# EAGLE board Secondary Board PCB 2 v6 (EAGLE 9.7.0)
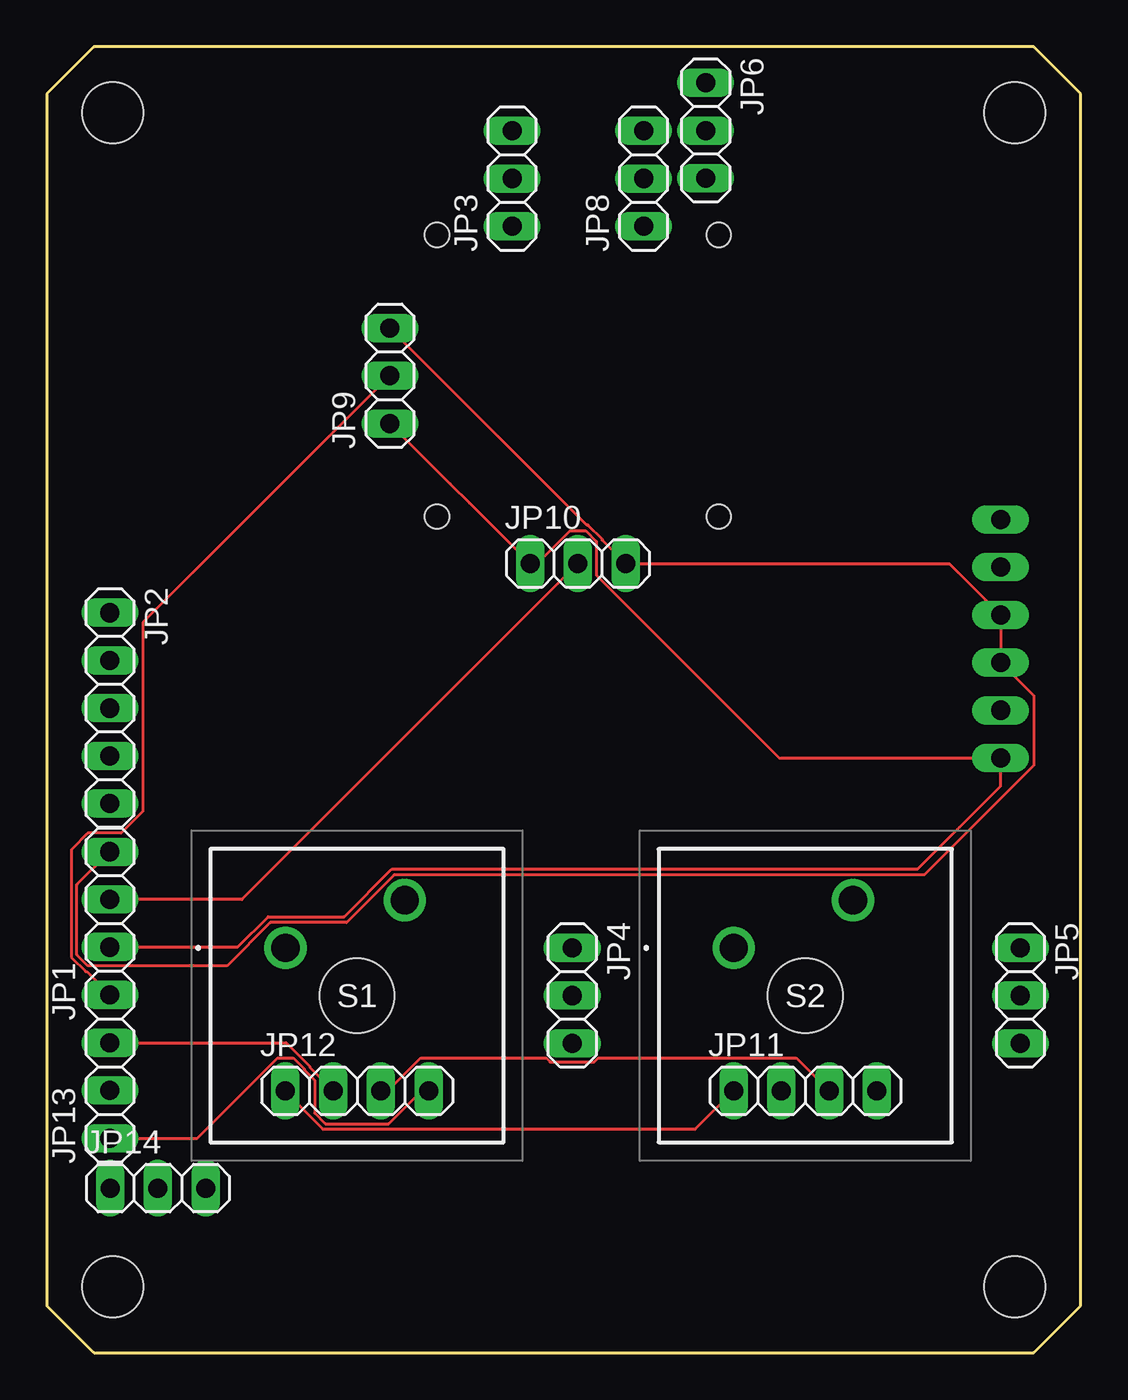
[diagram p0: board, top side]
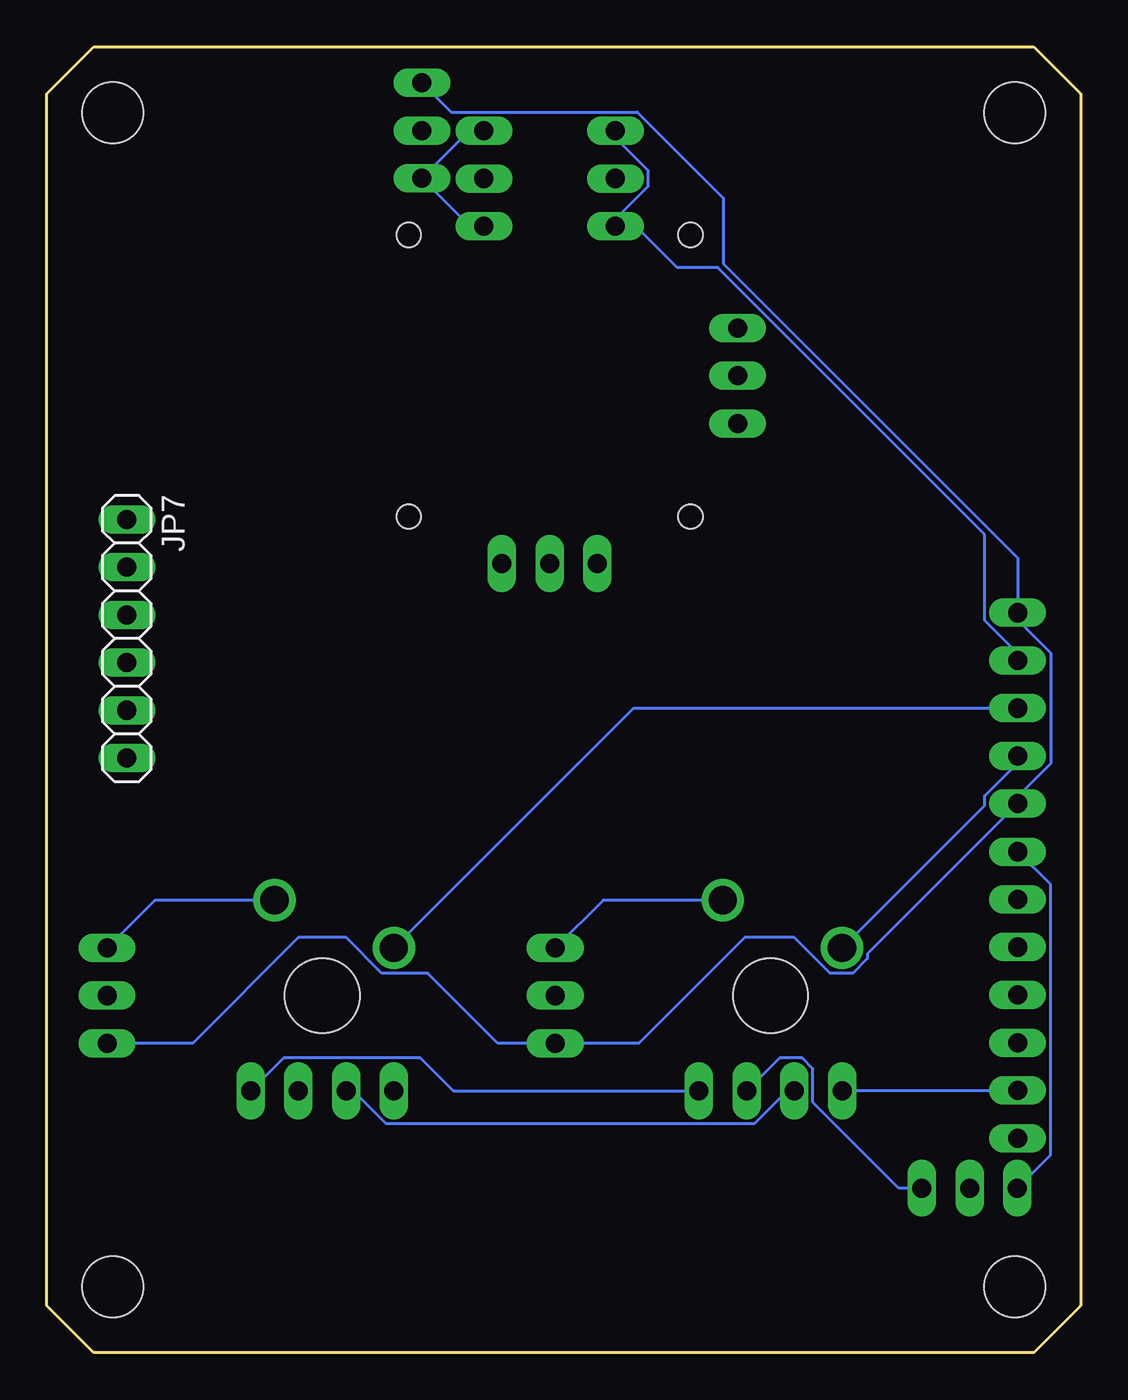
[diagram p1: board, bottom side, seen from below]

Size 55 x 69.5 mm. Coordinates in mm from the lower left corner, seen from the top.
Outline: 2.5,0 0,2.5 0,67 2.5,69.5 52.5,69.5 55,67 55,2.5 52.5,0 2.5,0
Copper layers (1*16): Top / Bottom
Stack-up Default Layer Stack: Top User Defined 0.035mm / Dielectric-1 User Defined 1.5mm / Bottom User Defined 0.035mm
Design rules "default": minimum track width 6mil, minimum drill 0.35mm, track to track 6mil, track to pad 6mil, pad to pad 6mil, via to via 6mil, smd to smd 6mil, copper to edge 40mil, drill to drill 6mil, minimum pad ring 10mil, minimum via ring 8mil, stop-mask expansion 4mil, vias tented up to drill 0mil, thermal gap 10mil
Holes 1.3 mm at 35.75,44.5 20.75,44.5 20.75,59.5 35.75,59.5
Holes 3.25 mm at 3.5,3.5 51.5,3.5 3.5,66 51.5,66

## Footprints (pad centres in the part's own frame; a part is rotated, then mirrored left to right if it is on the bottom)
1X04 = drill 1.016 long: 1 -3.81,0; 2 -1.27,0; 3 1.27,0; 4 3.81,0
1X05 = drill 1.016 long: 1 -5.08,0; 2 -2.54,0; 3 0,0; 4 2.54,0; 5 5.08,0
1X03 = drill 1.016 long: 1 -2.54,0; 2 0,0; 3 2.54,0
1X06 = drill 1.016 long: 1 -6.35,0; 2 -3.81,0; 3 -1.27,0; 4 1.27,0; 5 3.81,0; 6 6.35,0
MX1AE1NW = drill 1.499 pad 2.248: 1 0,0; 2 6.35,2.54 | hole 3.988: 3.81,-2.54

## Placement (x,y rotation side)
JP1  PINHD-1X4  [1X04]  3.35,22.85 90 top
JP2  PINHD-1X5  [1X05]  3.35,34.3 270 top
JP3  PINHD-1X3  [1X03]  24.75,62.5 90 top
JP4  PINHD-1X3  [1X03]  27.95,19 270 top
JP5  PINHD-1X3  [1X03]  51.8,19 270 top
JP6  PINHD-1X3  [1X03]  35.05,65.05 270 top
JP7  PINHD-1X6  [1X06]  50.75,38 270 bottom
JP8  PINHD-1X3  [1X03]  31.75,62.5 90 top
JP9  PINHD-1X3  [1X03]  18.25,52 90 top
JP10  PINHD-1X3  [1X03]  28.25,42 0 top
JP11  PINHD-1X4  [1X04]  40.35,13.93 0 top
JP12  PINHD-1X4  [1X04]  16.5,13.93 0 top
JP13  PINHD-1X3  [1X03]  3.35,13.95 90 top
JP14  PINHD-1X3  [1X03]  5.9,8.75 0 top
S1  MX1A-E1NW  [MX1AE1NW]  12.69,21.54 0 top
S2  MX1A-E1NW  [MX1AE1NW]  36.54,21.54 0 top

## Library data of the parts
JP1-JP14 = Connector; CATEGORY: CONNECTOR; SUB-CATEGORY: PIN-HEADER
S1 S2 = SamacSys_Parts; DESCRIPTION: Pushbutton Switches Full Travel, Mech. Keyswitch, Click Tactile Feel (Blue stem), 60cN, No LED, No Diode, Fixation Pins for PCB Mounting; HEIGHT: 15.2mm; MANUFACTURER_NAME: Cherry; MANUFACTURER_PART_NUMBER: MX1A-E1NW; MOUSER_PART_NUMBER: 540-MX1A-E1NW; MOUSER_PRICE-STOCK: https://www.mouser.co.uk/ProductDetail/CHERRY/MX1A-E1NW/?qs=Z7NFYKyvgJd45Wm4xzFv7w%3D%3D

## Nets
N$1: JP1.4 JP7.3 JP7.4 JP9.3 JP10.3 JP14.1
N$2: JP1.2 JP7.6 JP9.1 JP10.1
N$3: JP4.1 S1.2
N$4: JP5.1 S2.2
N$5: JP1.1 JP9.2
N$6: JP6.3 JP8.1 JP8.3
N$7: JP2.1 JP2.5 JP4.3 JP5.3 JP6.1
N$8: JP2.3 S2.1
N$9: JP2.4 S1.1
N$10: JP1.3 JP10.2
N$11: JP2.2 JP3.1 JP3.3
N$12: JP11.3 JP12.3 JP14.3
N$13: JP11.2 JP12.2 JP13.3
N$14: JP11.1 JP12.1 JP13.2
N$15: JP11.4 JP12.4 JP13.1

## Tracks (layer width: path | path; a pad name or v marks a point on that pad's centre or on a via)
N$1
  Top 0.152: JP1.4 1.6,24.91 1.6,21.17 2.18,20.59 9.59,20.59 11.89,22.89 15.94,22.89 18.48,25.43 46.7,25.43 52.5,31.24 52.5,34.98 JP7.4 JP7.3 48.02,42 JP10.3 29.55,43.24 29.55,43.3 28.79,44.06 28.73,44.06 JP9.3
  Bottom 0.152: JP14.1 1.6,10.51 1.6,24.91 JP1.4
N$2
  Top 0.152: JP9.1 21.47,46.24 22.49,45.22 JP10.1 26.09,42 27.84,43.75 28.66,43.75 29.24,43.17 29.24,41.39 38.98,31.65 JP7.6 50.75,30.15 46.34,25.74 18.35,25.74 15.81,23.2 11.77,23.2 10.15,21.58 JP1.2
N$3
  Bottom 0.152: S1.2 25.41,24.08 JP4.1
N$4
  Bottom 0.152: S2.2 49.26,24.08 JP5.1
N$5
  Top 0.152: JP9.2 5.1,38.85 5.1,28.81 3.94,27.65 2.18,27.65 1.29,26.77 1.29,21.04 2.05,20.28 2.11,20.28 JP1.1
N$6
  Bottom 0.152: JP8.3 32.52,65.04 JP6.3 32.5,59.96 JP8.1
N$7
  Bottom 0.152: JP6.1 33.49,66.03 23.58,66.03 19.01,61.46 19.01,57.96 3.35,42.3 JP2.1 3.35,39 1.6,37.25 1.6,31.35 3.35,29.6 JP2.5 11.34,21.23 11.34,20.98 12.13,20.19 13.32,20.19 15.22,22.09 17.87,22.09 23.5,16.46 JP4.3 31,16.46 34.73,20.19 37.17,20.19 39.07,22.09 41.63,22.09 47.25,16.46 JP5.3
N$8
  Bottom 0.152: S2.1 23.78,34.3 JP2.3
N$9
  Bottom 0.152: S1.1 5.1,29.13 5.1,29.63 3.35,31.38 JP2.4
N$10
  Top 0.152: JP10.2 10.37,24.12 JP1.3
N$11
  Bottom 0.152: JP2.2 3.35,37.22 5.1,38.97 5.1,43.56 19.3,57.76 21.47,57.76 23.67,59.96 JP3.1 24.75,60.34 23,62.09 23,62.91 24.75,64.66 JP3.3
N$12
  Top 0.152: JP12.3 18.15,13.93 19.9,15.68 26.56,15.68 26.78,15.47 29.12,15.47 29.34,15.68 39.87,15.68 JP11.3
  Bottom 0.152: JP14.3 9.67,8.75 14.24,13.32 14.24,15.1 14.82,15.68 16.02,15.68 JP12.3
N$13
  Top 0.152: JP12.2 13.98,15.18 13.98,15.23 12.72,16.49 JP13.3
  Bottom 0.152: JP12.2 15.61,13.93 17.36,12.18 36.95,12.18 38.7,13.93 JP11.2
N$14
  Top 0.152: JP12.1 12.93,13.68 12.93,13.63 14.69,11.87 34.48,11.87 JP11.1
  Bottom 0.152: JP13.2 12.67,13.95 JP12.1
N$15
  Top 0.152: JP13.1 8.01,11.41 12.28,15.68 13.1,15.68 13.68,15.1 13.68,15.05 14.24,14.49 14.24,12.76 14.82,12.18 18.18,12.18 19.93,13.93 JP12.4
  Bottom 0.152: JP12.4 33.38,13.93 35.13,15.68 42.41,15.68 JP11.4